# Altium PCB 12V_Horn_PCB.PcbDoc
Units mil, origin at the board's own origin, x right, y up, seen from the top; angles counter-clockwise.
Board outline 1775 x 2005 mil, 2 copper layers (Top Layer, Bottom Layer); 19 components, 12 nets, 58 pads, 30 vias.
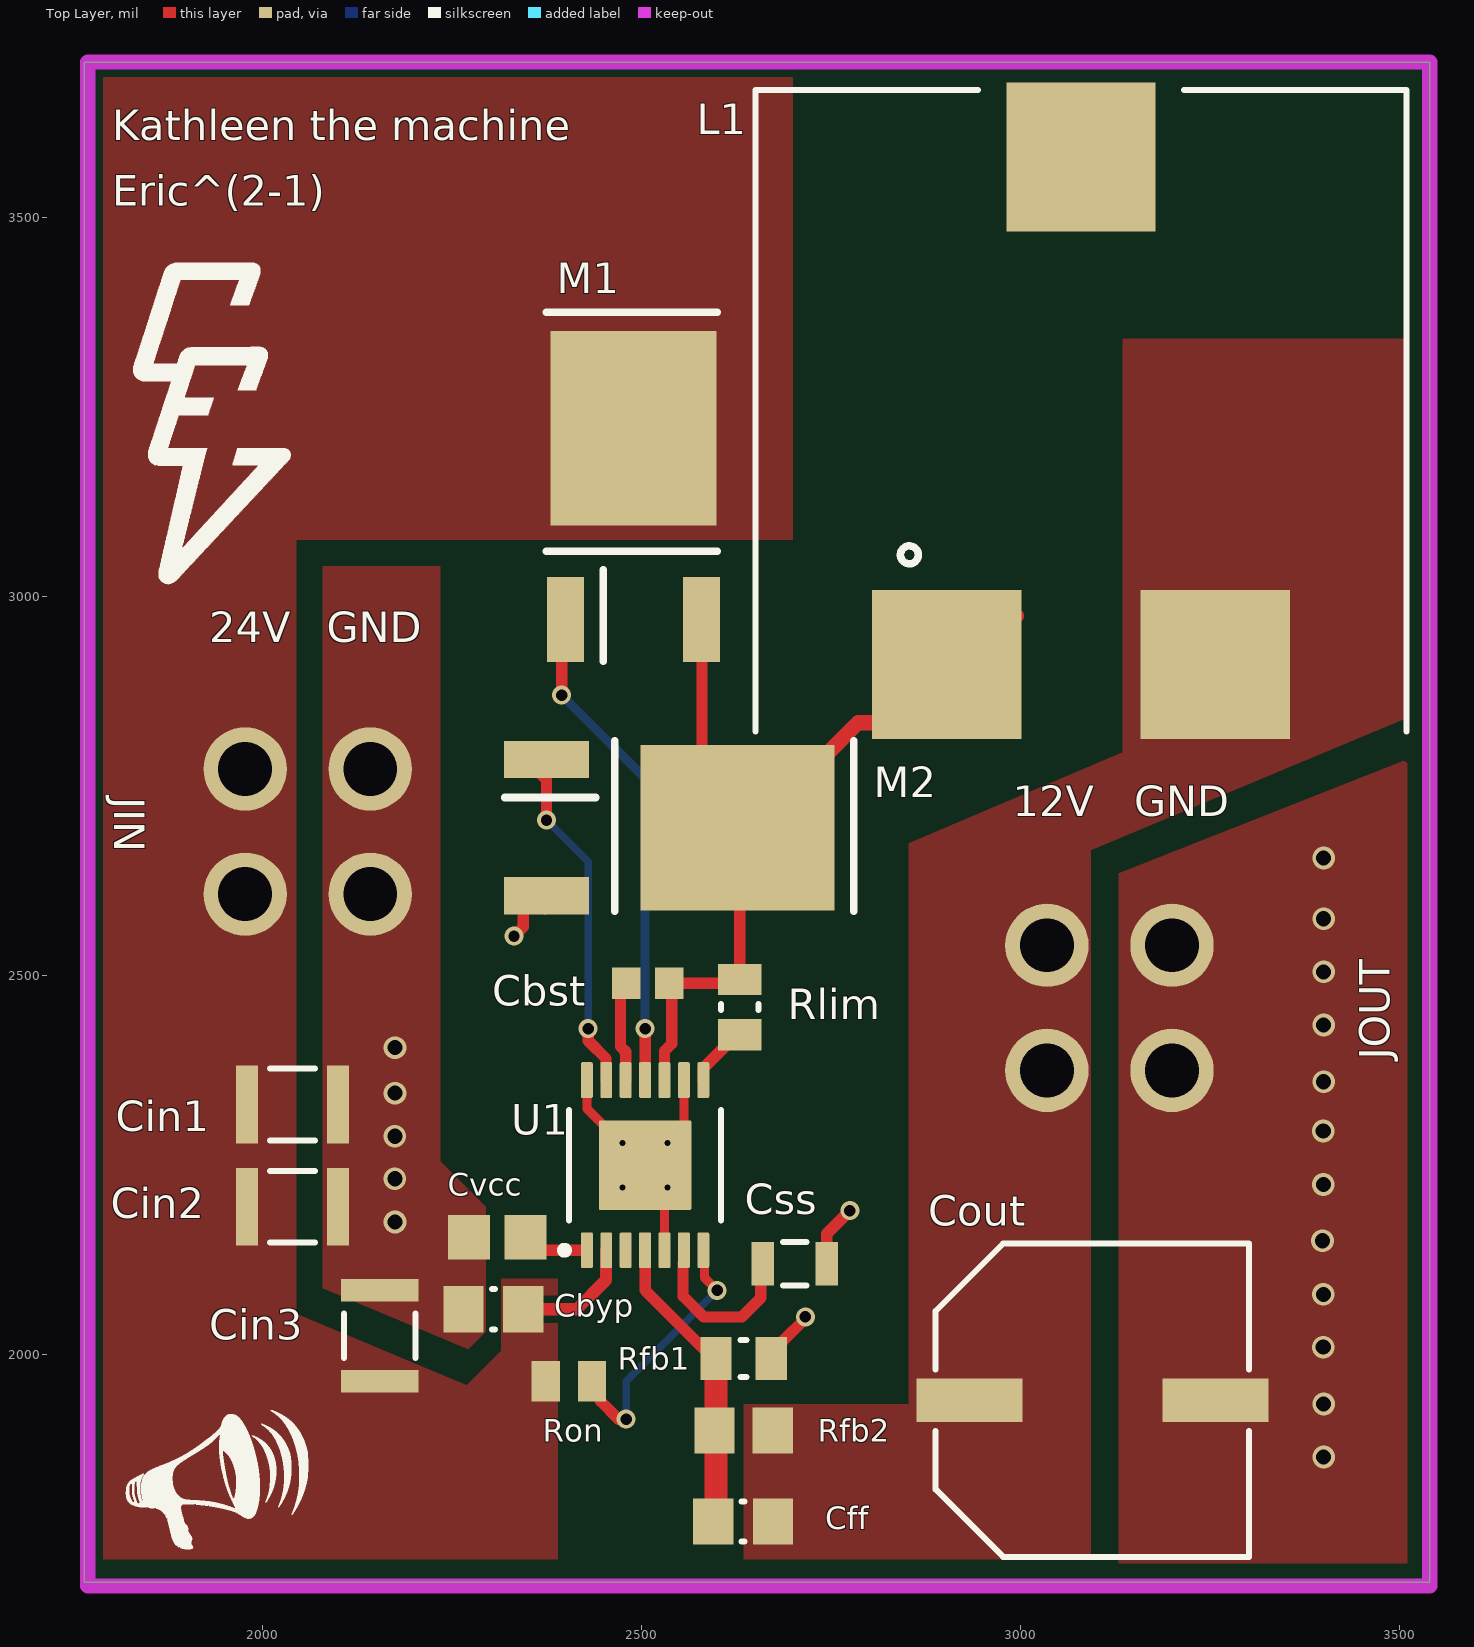
[diagram p0: Top Layer view]
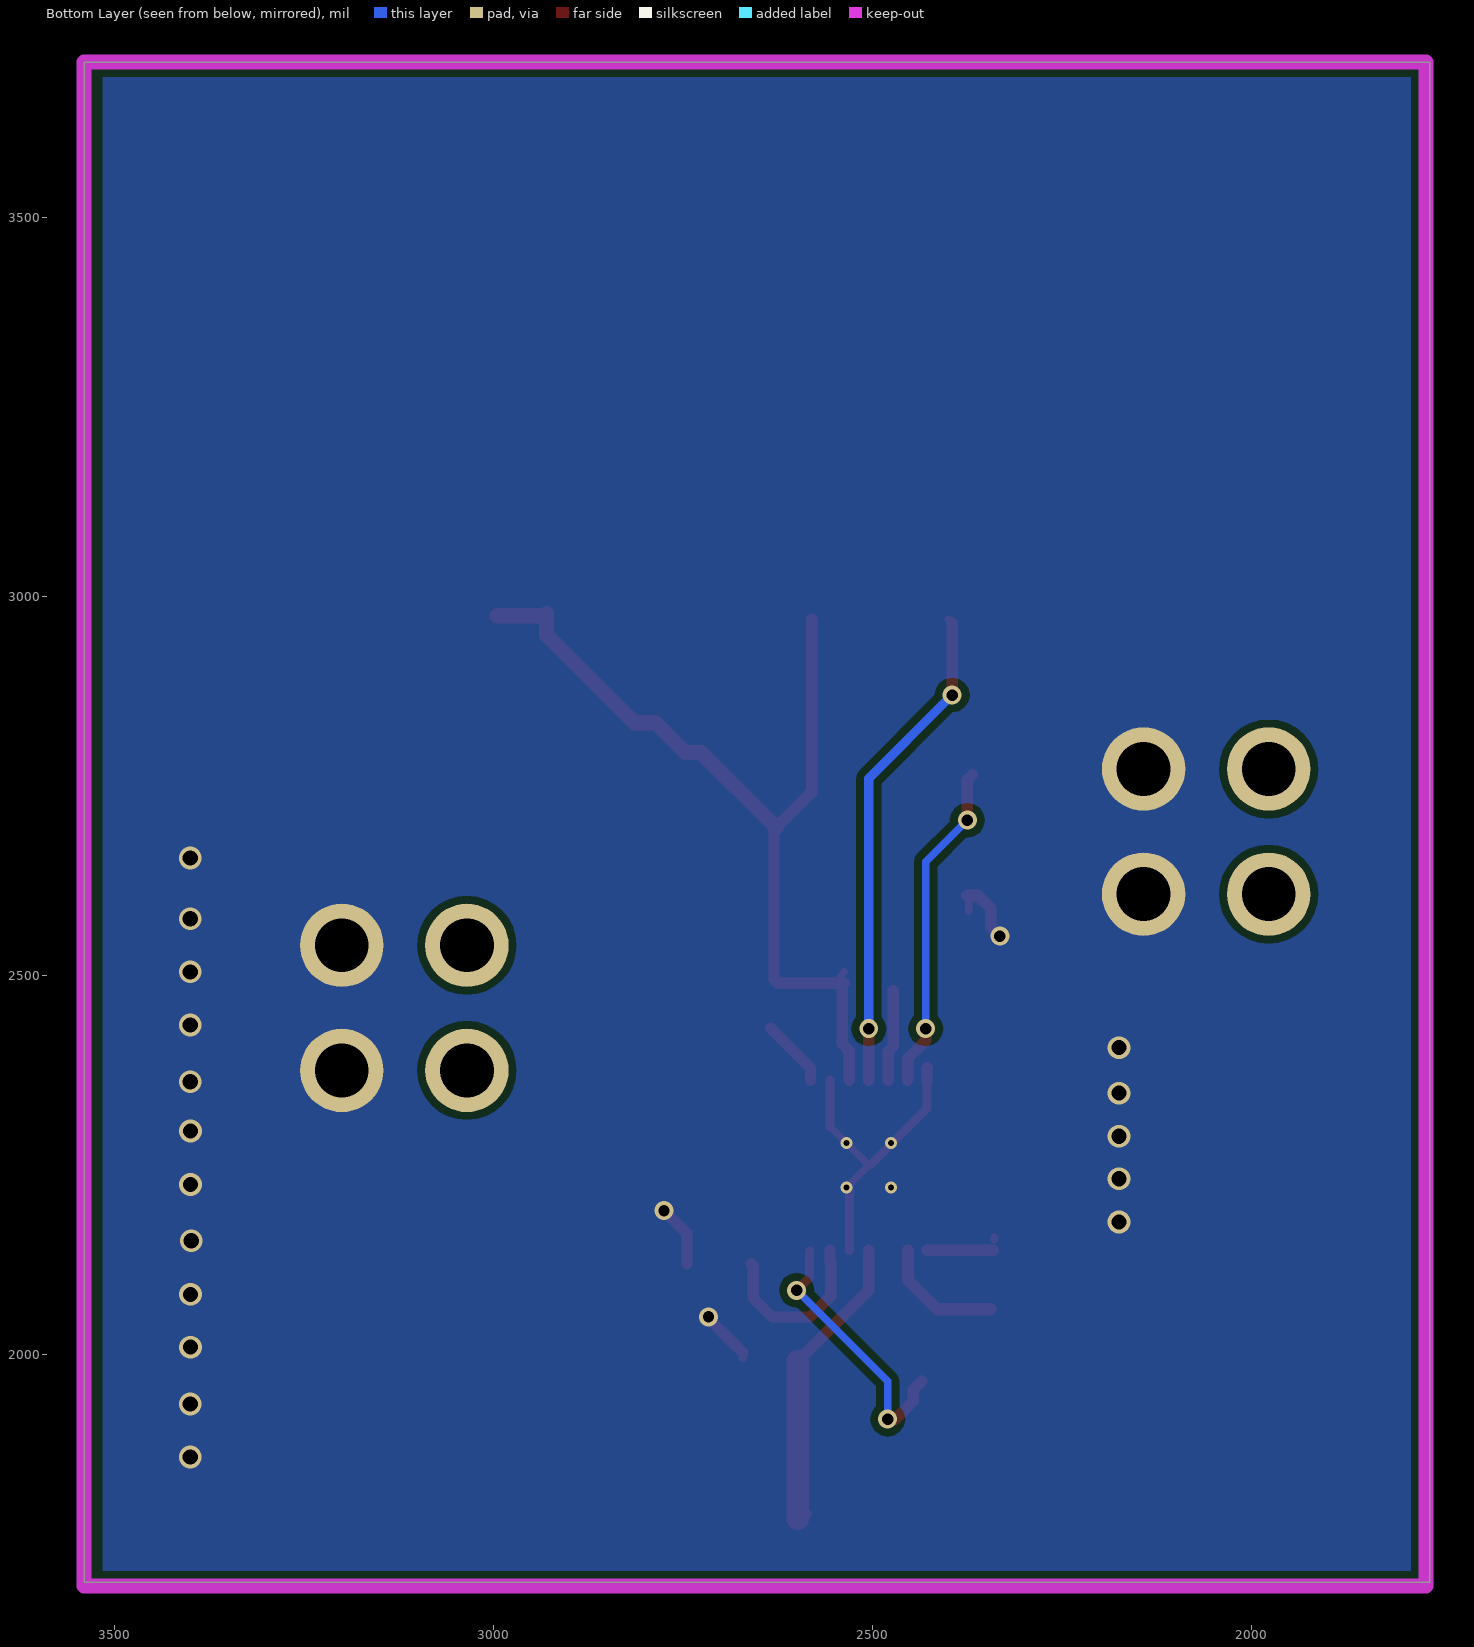
[diagram p1: Bottom Layer view, seen from below]

## Layer stack, top to bottom
Top Solder: solder mask 0.4, Solder Resist, Dk 3.5
Top Layer: signal copper 1.4
Dielectric 1: dielectric 12.6, FR-4, Dk 4.8
Bottom Layer: signal copper 1.4
Bottom Solder: solder mask 0.4, Solder Resist, Dk 3.5

## Board outline
1765,1700 3540,1700 3540,3705 1765,3705

## Design rules (kind name [scope] priority, off if disabled: settings)
Clearance [All] p1: gap=10 ignorepadtopadclearanceinfootprint=FALSE except(0: Arc-Hole Track-Hole SMDPad-Hole THPad-Hole Via-Hole Fill-Hole Poly-Hole Region-Hole Text-Hole; 7: Arc-Arc Arc-Track Track-Track; 9: Arc-SMDPad Track-SMDPad SMDPad-SMDPad)
MinimumSolderMaskSliver [All] p1: minsoldermaskwidth=5
PolygonConnect [All] p1: connectstyle=Direct reliefconductorwidth=10 reliefentries=4 polygonreliefangle="90 Angle" airgapwidth=10
RoutingVias [All] p1: holewidth=15 width=25 viastyle="Through Hole" minholewidth=10 minwidth=25 maxholewidth=30 maxwidth=50
SilkToSolderMaskClearance [IsPad] p1: minsilkscreentomaskgap=5 clearancetoexposedcopper=TRUE
SolderMaskExpansion [All] p1: expansion=4 istentingtop=FALSE
Width [All] p1: maxlimit=30 minlimit=10 preferedwidth=10 minimp=50.000000 maximp=50.000000 favimp=50.000000
28 further rules are at their usual default settings.

## Components (designator, comment, footprint, x,y, rotation, side; value= is the part's Value field where it differs from the comment)
Cbst "470nF" CAPC1608X90X35ML10T15 2508.54,2490 r180 top
Cbyp "100nF" CAPC0805(2012)100_M 2305,2060 r0 top
Cff "270pF 0805" CAPC0805(2012)75_M 2634.37,1780 r0 top value=270pF
Cin1 "10uF" CAPC3225X270X30LL30 2040,2330 r180 top
Cin2 "10uF" CAPC3225X270X30LL30 2040,2195 r180 top
Cin3 "10uF" CAPC3225X270X30LL30 2155,2025 r270 top
Cout "180uF" PNSC-SVP-F8_L 3095,1940 r0 top
Css "15nF" FP-CGA4J-IPC_B 2702.32,2120 r0 top
Cvcc "2.2uF" CAPC2013X135X50ML10T20 2310,2155 r0 top
JIN "Header" "MINIFITJR 2X2"#1 2060,2690 r180 top
JOUT "Header" "MINIFITJR 2X2"#2 3117.5,2457.5 r180 top
L1 "7443630860" WE-HCF-2013 3080,3245 r90 top
M1 "FDD8647L" FDD86471L 2400,2970 r0 top
M2 "FDD8647L" FDD86471L 2375,2785 r270 top
Rfb1 "10K" RESC2013X50X30NL20T20 2635,1995 r180 top
Rfb2 "191K" RESC2013X70X40ML20T20 2635,1900 r0 top
Rlim "2.21K" RESC2013X50X30NL20T20 2630,2458.58 r90 top
Ron "ERJ-6ENF3743V" RESC2013X70X40LL20T20 2404.49,1965 r0 top
U1 "LM3150MHE/NOPB" PWP0014A_L 2505,2250 r90 top

## Footprints (in the part's own frame and the unit in brackets; to place one, negate y for a bottom-side part, rotate by r counter-clockwise, add the part's x,y. Pads: shape width x height; smd on the part's side, far side on the other; paste and mask are expansions set on the pad)
CAPC0805(2012)75_M [mm] "Chip Capacitor, Body 2.0x1.2mm, Height 0.75mm, IPC Low Density"
  rect 1.35x1.55 smd: 1(-1,0) 2(1,0)
  silkscreen extent -0.05,-0.67 0.05,0.67, body extent -1.1,-0.72 1.1,0.72, height 0.75
CAPC0805(2012)100_M [mm] "Chip Capacitor, Body 2.0x1.2mm, Height 1.0mm, IPC Low Density"
  rect 1.35x1.55 smd: 1(-1,0) 2(1,0)
  silkscreen extent -0.05,-0.67 0.05,0.67, body extent -1.1,-0.72 1.1,0.72, height 1
CAPC1608X90X35ML10T15 [mm] "Chip Capacitor, 2-Leads, Body 1.60x0.80mm, IPC Low Density"
  rect 0.95x1.05 smd: 1(-0.725,0) 2(0.725,0)
  body extent -0.85,-0.45 0.85,0.45, height 0.9
CAPC2013X135X50ML10T20 [mm] "Chip Capacitor, 2-Leads, Body 2.00x1.25mm, IPC Low Density"
  rect 1.4x1.5 smd: 1(-0.95,0) 2(0.95,0)
  body extent -1.05,-0.67 1.05,0.67, height 1.35
CAPC3225X270X30LL30 [mm] "Chip Capacitor, 2-Leads, Body 3.5x2.7mm, IPC High Density"
  rect 0.75x2.6 smd: 1(-1.525,0) 2(1.525,0)
  silkscreen extent -0.75,-1.2 0.75,1.2, body extent -1.75,-1.35 1.75,1.35, height 2.7
FDD86471L [mm]
  rect 1.25x2.85 smd: 1(0,0) 3(4.56,0)
  rect 5.55x6.5 smd: 4(2.28,6.4)
  silkscreen extent -0.64,-1.4 5.08,10.29
FP-CGA4J-IPC_B [mm]
  rect 0.756x1.456 smd paste+0 mask+0: 1(-1.075,0) 2(1.075,0)
  silkscreen extent -0.4,-0.73 0.4,0.73, body extent -1.7,-0.98 1.7,0.98, height 0.25
"MINIFITJR 2X2"#1 [mil]
  round 110 hole 71: 1(82.5,82.5) 2(-82.5,82.5) 3(82.5,-82.5) 4(-82.5,-82.5)
"MINIFITJR 2X2"#2 [mil]
  round 110 hole 71: 1(82.5,-82.5) 2(-82.5,-82.5) 3(82.5,82.5) 4(-82.5,82.5)
PNSC-SVP-F8_L [mm] "Aluminum Electrolytic Capacitor, Body 10.30x10.30x8.00mm, IPC High Density"
  rect 3.55x1.45 smd: 1(-4.125,0) 2(4.125,0)
  silkscreen extent -5.25,-5.25 5.25,5.25, body extent -5.5,-5.25 5.5,5.25, height 8
PWP0014A_L [mm] "SOP, 14-Leads, Body 5.1x4.5mm, Pitch 0.65mm, Thermal Pad 3x3.1mm, IPC High Density"
  rrect25% 1.2x0.4 smd mask+0.051: 1(-2.85,1.95) 2(-2.85,1.3) 3(-2.85,0.65) 4(-2.85,0) 5(-2.85,-0.65) 6(-2.85,-1.3) 7(-2.85,-1.95) 8(2.85,-1.95) 9(2.85,-1.3) 10(2.85,-0.65) 11(2.85,0) 12(2.85,0.65) 13(2.85,1.3) 14(2.85,1.95)
  rrect3% 3x3.1 smd: 15(0,0)
  silkscreen extent -2.97,-2.55 1.85,2.82, body extent -3.21,-2.5 3.21,2.5, height 1
RESC2013X50X30NL20T20 [mm] "Chip Resistor, 2-Leads, Body 2.00x1.25mm, IPC Medium Density"
  rect 1.05x1.45 smd: 1(-0.925,0) 2(0.925,0)
  silkscreen extent -0.1,-0.63 0.1,0.63, body extent -1.1,-0.72 1.1,0.72, height 0.5
RESC2013X70X40LL20T20 [mm] "Chip Resistor, 2-Leads, Body 2.00x1.25mm, IPC High Density"
  rect 0.95x1.35 smd: 1(-0.775,0) 2(0.775,0)
  body extent -1.1,-0.72 1.1,0.72, height 0.7
RESC2013X70X40ML20T20 [mm] "Chip Resistor, 2-Leads, Body 2.00x1.25mm, IPC Low Density"
  rect 1.35x1.55 smd: 1(-0.975,0) 2(0.975,0)
  body extent -1.1,-0.72 1.1,0.72, height 0.7
WE-HCF-2013 [mm] "SMD Inductor, 3-Leads, Body 21.5 x 21.0 mm"
  rect 5x5 smd: 1(-8.5,4.5) 2(-8.5,-4.5) 3(8.5,0)
  silkscreen extent -10.75,-10.9 10.75,10.9, body extent -10.45,-10.8 10.55,10.7, height 13.98

## Part data
Cbst: library part CMP-2006-02798-1, Manufacturer=Murata, Part Number=GRM188R60J474KA01D
Cbyp: library part CMP-1036-04423-1, "CAP 100nF 50V ±20% 0805 (2012 Metric) Thickness 1mm SMD", Case-EIA=0805, Case-Metric=2012, Rated Voltage="50 V", Tolerance=Â±20%, Max Thickness="1 mm", Technology=SMT
Cff: library part CMP-1036-02418-1, "CAP 270pF 100V ±5% 0805 (2012 Metric) Thickness 0.75mm SMD", Case-EIA=0805, Case-Metric=2012, Rated Voltage="100 V", Tolerance=Â±5%, Max Thickness="0.75 mm", Technology=SMT
Cin1 Cin2 Cin3: library part CMP-2000-07458-1, "Chip Capacitor, 10 uF, +/- 10%, 63 V, -55 to 125 degC, 1210 (3225 Metric), RoHS, Tape and Reel", Case Code (Imperial)=1210, Case Code (Metric)=3225, Dielectric=X7R, Dielectric Material=Ceramic, Manufacturer=Murata, Max Operating Temperature=125degC, Min Operating Temperature=-55degC, Package Description="2-Pin Surface Mount Device, Body 3.2 x 2.5 mm", Package Quantity=1000, Tolerance=10%, Voltage=63V, Capacitance=10uF, Case\/Package=1210, Datasheet URL=http://search.murata.co.jp/Ceramy/image/img/A01X/G101/ENG/GRM32ER71J106KA12-01.pdf, Datasheet Version=03/2016, Depth=2.5mm, Height=2.5mm, Lead Free=LeadFree, Length=3.2mm, Manufacturer URL=http://www.murata.com/, Material=Ceramic, Mounting Technology=SurfaceMount, Package Reference=1210, Packaging=TapeandReel, REACH SVHC=NoSVHC, RoHSCompliant=true, Termination=SMD/SMT, Thickness=0.106inch, Voltage Rating=63V, Voltage Rating (DC)=63V, Weight=0.00388oz, Width=2.5mm
Cout: library part CMP-2000-05493-1, "Conductive Polymer Aluminum Solid Capacitor, 180 uF, +/- 20%, 16 V, -55 to 105 degC, 2-Pin SMD (F8), RoHS, Tape and Reel", Manufacturer=Panasonic, Operating Temp Range=-55Cto105C, Package Description="2-Pin Surface Mount Device, Body 10.3 x 10.3 mm", Package Reference=SVP-F8, Ripple Current=3.02A, Tolerance (+ or -)=20%, Voltage=16VDC, Capacitance=180uF, Construction=Cylindrical, Datasheet URL=https://industrial.panasonic.com/cdbs/www-data/pdf/AAB8000/AAB8000C193.pdf, Datasheet Version=11/2015, DCL=576uA, ESR=30mOhm, Failure Rate=NotRequired, Lead Diameter (nom)=NotRequiredmm, Lead Spacing (nom)=NotRequiredmm, Lifetime=2000hr, Manufacturer URL=http://www.panasonic.com/, Mounting Style=SurfaceMount, Mounting Technology=SurfaceMount, Packaging=TapeandReel, Product Depth (mm)=NotRequiredmm, Product Diameter (mm)=10mm, Product Height (mm)=7.9mm, Product Length (mm)=NotRequiredmm, Seated Plane Height=NotRequiredmm, Size (mm)=10X7.9mm, Type=OS-CON
Css: library part CMP-08246-000331-1, "Cap Ceramic 15nF 50V C0G 5% Pad SMD 0805 +125°C Automotive T/R", Case Code (Imperial)=0805, Case Code (Metric)=2012, Dielectric=C0G, Max Operating Temperature=125°C, Min Operating Temperature=-55°C, Package Quantity=1, Ratings=AEC-Q200, Tolerance=5%, Voltage Rating=50V, Capacitance=15nF, Case/Package=0805, Composition=Ceramic, Depth=1.25mm, Height=0.85mm, Lead Free="Lead Free", Length=2mm, Mount="Surface Mount", Packaging="Tape and Reel", REACH SVHC="No SVHC", Termination=SMD/SMT, Thickness=0.037inch, Voltage Rating (DC)=50V, Weight=0.000194oz, Width=0.049inch
Cvcc: library part CMP-2007-03454-1, Manufacturer=Murata, Part Number=GRM21BR71A225KA01L
JIN JOUT: library part "MiniFit Jr 2x2", "Header, 2x2"
L1: library part CMP-0226-00159-1, "SMD High Current Inductor WE-HCF, L=8.60 µH", Inductance="8.60 ÂµH", ComponentLink1Description="Manufacturer Link", ComponentLink1URL=http://www.we-online.com, ComponentLink2Description=Datasheet, ComponentLink2URL=http://www.we-online.de/katalog/media/pdf/7443630860.pdf, DatasheetVersion="ver 1, Jul-2009", PackageDescription="SMD Inductor, 3-Leads, Body 21.5 x 21.0 mm", PackageReference=WE-HCF-2013, PackageVersion=2009
Rfb1: library part CMP-2001-04908-1, Manufacturer="Vishay Dale", Part Number=CRCW080510K0FKEA
Rfb2: library part CMP-2001-00021-1, Manufacturer=Panasonic, Part Number=ERJ-6ENF1913V
Rlim: library part CMP-2001-03763-1, Manufacturer="Vishay Dale", Part Number=CRCW08052K21FKEA
Ron: library part CMP-2001-00156-1, Manufacturer=Panasonic, Part Number=ERJ-6ENF3743V
U1: library part CMP-0069-01799-3, "SIMPLE SWITCHER® CONTROLLER, 42V Synchronous Step-Down, 14-pin TSSOP-EP, Pb-Free", Manufacturer="Texas Instruments", PackageTopMarking=NSUZXYTT*LM3150*MH, PowerWise=Y, Code_JEDEC=MO-153-ABT-1, ComponentLink1Description="Datasheet URL", ComponentLink1URL=http://www.ti.com/general/docs/lit/getliterature.tsp?genericPartNumber=LM3150&fileType=pdf, CompType=Switcher, PackageDescription="Molded TSSOP, JEDEC, Exposed Pad, 5.0 x 4.4 x 0.9mm Body, 14 Lead, 0.65mm Pitch", PackageReference=PWP0014A, PinCount=14, RoHS=Y

## Via types
v1: diameter 30, hole 20, Top Layer to Bottom Layer, 17 vias
v2: diameter 25, hole 15, Top Layer to Bottom Layer, 9 vias
v3: diameter 15.75, hole 7.87, Top Layer to Bottom Layer, 4 vias

## Nets (pads, with @x,y where several pads share a name; then routed paths per layer and width w, separated by ;. In a path a pad name is that pad's centre, name@x,y a point inside that pad or via, vN(x,y) a via of type N, cw(c..) or ccw(c..) an arc to the next point about the centre after c; other vN are vias at no path point)
12V: Cff.2 Cout.1 JOUT.1 JOUT.3 L1.2 Rfb2.2
24V_BAT: Cbyp.2 Cin1.2 Cin2.2 Cin3.2 JIN.1 JIN.3 M1.4 Ron.1 U1.2 | length 164.5
  Top Layer w15: U1.2@2453.44,2137.42 U1.2
  Top Layer w16: Cbyp.2 2415,2060 2453.44,2098.44 U1.2@2453.44,2137.42
BST: Cbst.2 U1.12 | length 120.7
  Top Layer w15: Cbst.2@2472.5,2480 2472.5,2406.54 2479.41,2399.63 U1.12
FB: Cff.1 Rfb1.2 Rfb2.1 U1.4 | length 421.7
  Top Layer w10: Cff.1@2585,1790 Cff.1 Cff.1@2598.58,1783.58 ; Rfb1.2@2598.58,1991.42 Rfb1.2
  Top Layer w12: Rfb2.1 Rfb2.1@2596.61,1903.94
  Top Layer w15: U1.4 2505,2085 2598.58,1991.42 Rfb1.2@2600,1990
  Top Layer w30: Cff.1@2598.58,1783.58 Rfb1.2@2598.58,1991.42
GND: Cbyp.1 Cin1.1 Cin2.1 Cin3.1 Cout.2 Css.2 Cvcc.1 JIN.2 JIN.4 JOUT.2 JOUT.4 M2.3 Rfb1.1 U1.5 U1.9 U1.14 U1.15 | length 667.1
  Top Layer w10: M2.3@2373.03,2585.24 M2.3@2373.03,2599.09 ; U1.15@2503.03,2250 U1.15 ; U1.15@2530.59,2224.41 U1.15 ; U1.15@2556.18,2301.18 v3(2534.53,2279.53) U1.15 ; Rfb1.1 Rfb1.1@2671.42,2002.87 ; v2@2716.42,2047.87 v2(2716.42,2050)
  Top Layer w12: U1.14 2428.23,2324.8 U1.15@2503.03,2250 ; U1.5 U1.15@2530.59,2224.41 ; U1.15@2556.18,2301.18 U1.9
  Top Layer w15: v2(2332.12,2552.12) 2344.24,2564.24 M2.3@2344.24,2588.87 ; U1.14@2427.85,2378.33 2428.23,2377.95 U1.14 ; Rfb1.1@2671.42,2002.87 2687.09,2018.54 v2@2716.42,2047.87 ; Css.2 2744.65,2159.65 v2(2775,2190)
  Top Layer w16: M2.3@2344.24,2588.87 2360.85,2605.47 M2.3
  other v1: 3400,1865 3400,1935 3399.5,2010 3399.63,2079.66 3398.55,2150.25 2175,2175 3399.63,2224.66 2174.96,2232.06 2174.96,2288.24 3399.5,2295 2175,2345 3400,2360 2175,2405 3400,2435 3400,2505 3400,2575 3400,2655
  other v3: 2475.47,2220.47 2534.53,2220.47 2475.47,2279.53
HG: M1.1 U1.11 | length 655.4
  Top Layer w10: M1.1@2395,2965 M1.1
  Top Layer w15: v2(2395,2870) M1.1@2395,2965 ; U1.11 v2(2505,2430)
  Bottom Layer w10: v2(2395,2870) v2@2401.95,2863.05
  Bottom Layer w12: v2@2401.95,2863.05 2505,2760 v2(2505,2430)
LG: M2.1 U1.13 | length 437.9
  Top Layer w15: M2.1@2368.42,2764.76 2375,2758.19 v2(2375,2705) ; v2(2430,2430) 2430,2414.11 2453.44,2390.67 2453.44,2362.58 U1.13
  Bottom Layer w10: v2(2375,2705) 2430,2650 v2(2430,2430)
NetCvcc_2: Cvcc.2 U1.1 | length 90.9
  Top Layer w10: Cvcc.2@2339.53,2151.42 Cvcc.2@2339.53,2155
  Top Layer w15: Cvcc.2@2340.89,2137.8 U1.1
NetRlim_1: Rlim.1 U1.8 | length 90.2
  Top Layer w15: U1.8 2581.77,2377.95 Rlim.1@2634.41,2430.59
NetRon_2: Ron.2 U1.7 | length 354.5
  Top Layer w10: U1.7 U1.7@2583.39,2136.18
  Top Layer w12: U1.7@2583.39,2136.18 2583.39,2101.61 v2(2600,2085)
  Top Layer w15: Ron.2 2446.2,1953.8 2446.2,1938.8 2470,1915 v2(2480,1915)
  Bottom Layer w10: v2(2480,1915) 2480,1965 v2(2600,2085)
SS: Css.1 U1.6 | length 231.5
  Top Layer w15: U1.6 2556.18,2122.05 2555,2120.87 2555,2077.27 2582.5,2049.77 2632.5,2049.77 2657.5,2074.77 2657.5,2117.5 Css.1
SW: Cbst.1 L1.1 M1.3 M2.4 Rlim.2 U1.10 | length 1220
  Top Layer w10: Cbst.1@2537.09,2505 Cbst.1@2542.09,2500 ; Rlim.2@2625,2490 Rlim.2
  Top Layer w15: U1.10 2530.59,2400.59 2540,2410 Cbst.1@2540,2480 ; Cbst.1 Rlim.2@2625,2490 ; M2.4@2580,2742.2 M1.3@2580,2970 ; Rlim.2 M2.4@2630,2698.27
  Top Layer w16: M2.4@2580,2742.2 M2.4
  Top Layer w20: M2.4 2630,2698.27 2726.22,2794.49 2746.97,2794.49 2786.13,2833.64 2814.41,2833.64 2929.8,2949.04 L1.1@2929.8,2977.32 ; L1.1@2932.48,2974.65 L1.1@2995,2974.65
pads on no net: L1.3 U1.3

## Polygon pours and split planes (outlines as drawn)
12V on Top Layer "Top Layer-12V" (solid, pour order 16): 2635,1730 3092.5,1730 3092.5,2665.12 3510,2840.12 3510,3340 3135,3340 3135,2794.47 2852.5,2674.47 2852.5,1935 2635,1935
GND on Top Layer "GND_L01_P014" (solid, pour order 14): 3130,2635 3510,2785 3510,1725 3130,1725
GND on Top Layer "GND_L01_P009" (solid, pour order 9): 2080,3040 2235,3040 2235,2255 2295,2195 2295,2030 2272.05,2007.05 2080,2087.55
24V_BAT on Top Layer "Top Layer-24V_BAT" (solid, pour order 12): 2700,3075 2700,3685 1790,3685 1790,1730 2390,1730 2390,2100 2315,2100 2315,2005 2270,1960 2045,2054.19 2045,3075
no net on Top Layer "NONET_L01_P008" (solid, pour order 8): 1990,2420
no net on Top Layer "NONET_L01_P005" (solid, pour order 5): 2475,3180
no net on Top Layer "NONET_L01_P003" (solid, pour order 3): 2250,2365
no net on Top Layer "NONET_L01_P002" (solid, pour order 2): 2230,2660
no net on Top Layer "NONET_L01_P000" (solid, pour order 0): 2060,2610
GND on Bottom Layer "GND_L02_P017" (solid, pour order 17): 1765,3690 3515,3690 3515,1715 1765,1715

## Keep-outs
Keep-Out Layer:
  lines w20: 1770,3700 1770,1695 3540,1695 3540,3700 ; 1770,3705 3540,3705

## Silkscreen, mask and mechanical layers (free items; w line width, h text height)
Top Overlay:
  drawing of 6 lines, arcs and shapes, not listed
  text "Kathleen the machine" at 1802,3602 h40
  text "Eric^(2-1)" at 1802,3515.33 h40
  text "24V" at 1930,2940 h40
  text "GND" at 2085,2940 h40
  text "12V" at 2990,2710 h40
  text "GND" at 3150,2710 h40